# Altium PCB Transfomer_fully-interleaved-type1.PcbDoc (part 2 of 2)
Units mm, origin at the board's own origin, x right, y up, seen from the top; angles counter-clockwise.
Board outline 177 x 117 mm, 6 copper layers (Top Layer, Mid-Layer 1, Mid-Layer 2, Mid-Layer 3, Mid-Layer 4, Bottom Layer); 9 components, 18 nets, 66 pads, 510 vias.
Unrouted connection lines stored in the file: 9.
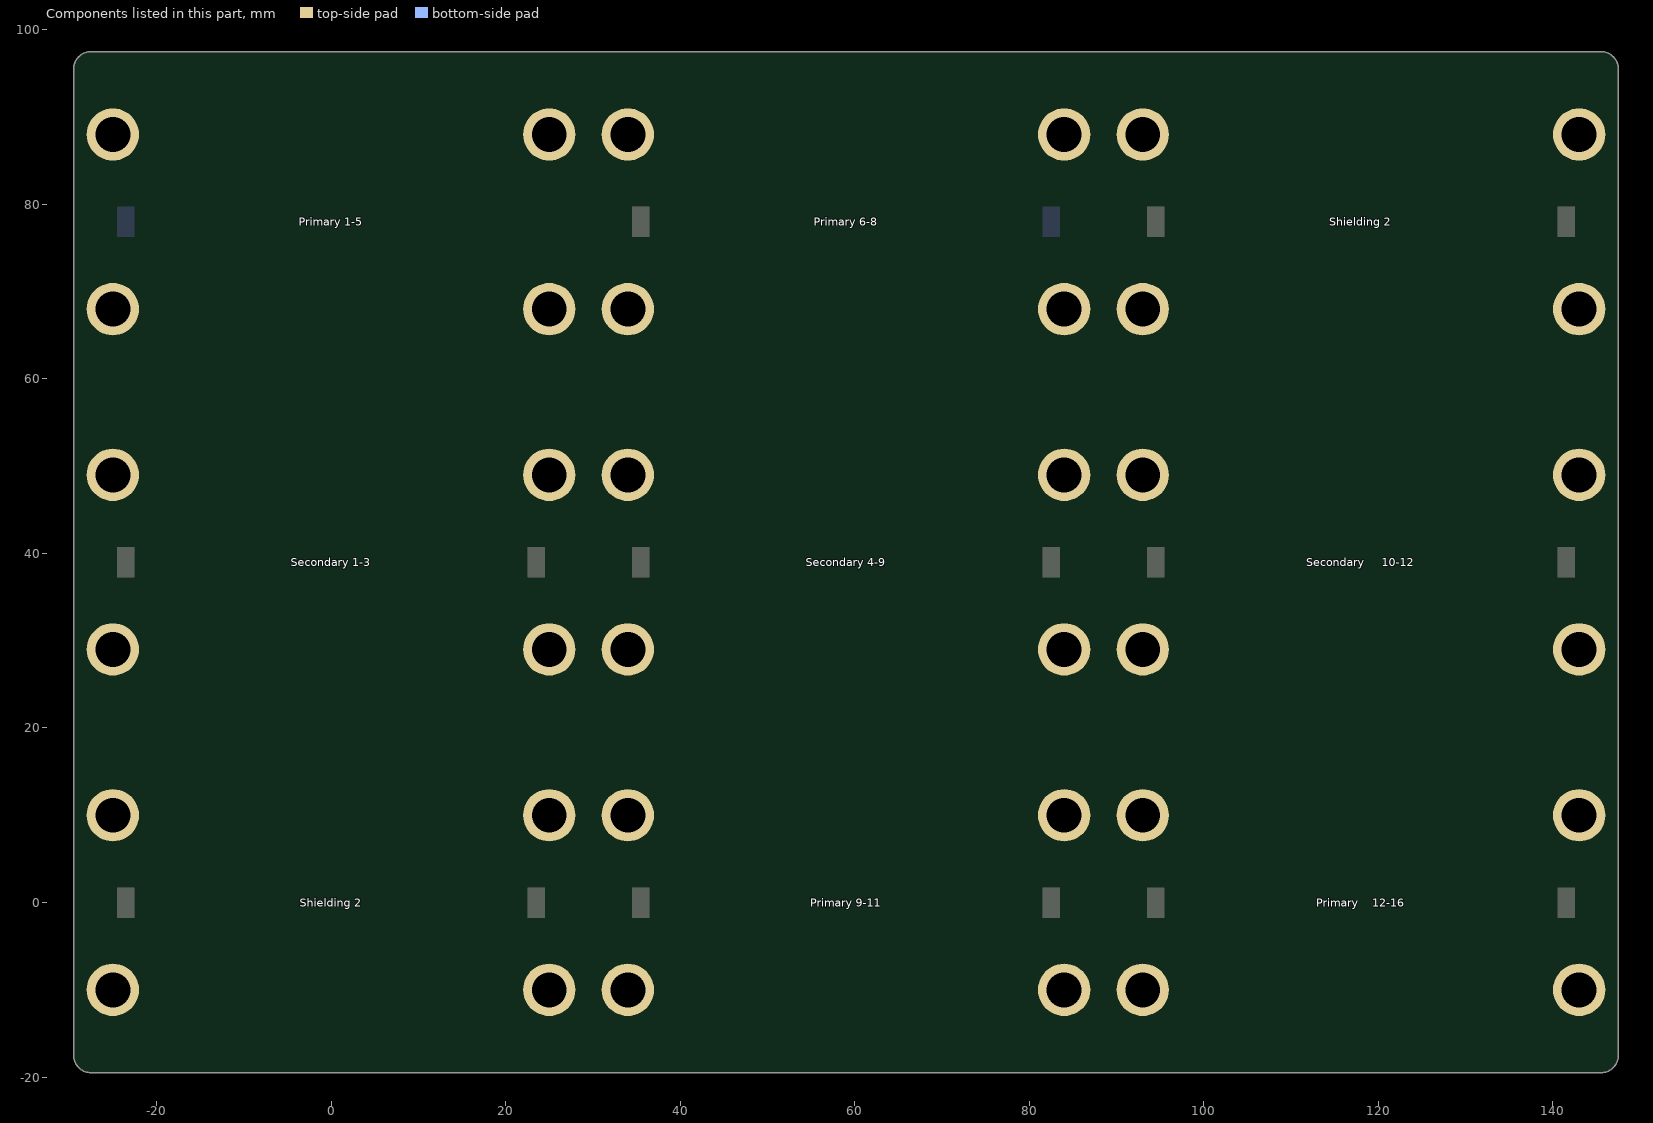
[diagram p6: the components of this part, seen from the top]

## Keep-outs (continued)
Mid-Layer 3:
  circle w1: c84,-10 r3.5
  circle w1: c84,10 r3.5
  circle w1: c34,-10 r3.5
  circle w1: c34,10 r3.5
  circle w1: c143,29 r3.5
  circle w1: c143,49 r3.5
  circle w1: c93,29 r3.5
  circle w1: c93,49 r3.5
  circle w1: c25,29 r3.5
  circle w1: c25,49 r3.5
  circle w1: c-25,29 r3.5
  circle w1: c-25,49 r3.5
  circle w1: c84,68 r3.5
  circle w1: c84,88 r3.5
  circle w1: c34,68 r3.5
  circle w1: c34,88 r3.5
  circle w1: c93,10 r3.5
  circle w1: c93,-10 r3.5
  circle w1: c143,10 r3.5
  circle w1: c143,-10 r3.5
  circle w1: c-25,10 r3.5
  circle w1: c-25,-10 r3.5
  circle w1: c25,10 r3.5
  circle w1: c25,-10 r3.5
  circle w1: c34,49 r3.5
  circle w1: c34,29 r3.5
  circle w1: c84,49 r3.5
  circle w1: c84,29 r3.5
  circle w1: c143,68 r3.5
  circle w1: c143,88 r3.5
  circle w1: c93,68 r3.5
  circle w1: c93,88 r3.5
  circle w1: c-25,88 r3.5
  circle w1: c-25,68 r3.5
  circle w1: c25,88 r3.5
  circle w1: c25,68 r3.5
  lines w1: -29,-6.5 -25,-6.5 ; -29,6.5 -25,6.5 ; -29,32.5 -25,32.5 ; -29,45.5 -25,45.5 ; -29,71.5 -25,71.5 ; -29,78 -10,78 ; -29,84.5 -25,84.5 ; -21.5,-14 -21.5,-10 ; -21.5,10 -21.5,14 ; -21.5,25 -21.5,29 ; -21.5,49 -21.5,53 ; -21.5,64 -21.5,68 ; -21.5,88 -21.5,92 ; 11,58.947 ccw(c0,78) 11,97.053 ; 21.5,-14 21.5,-10 ; 21.5,10 21.5,14 ; 21.5,25 21.5,29 ; 21.5,49 21.5,53 ; 21.5,64 21.5,68 ; 21.5,88 21.5,92 ; 25,-6.5 29,-6.5 ; 25,6.5 29,6.5 ; 25,32.5 29,32.5 ; 25,45.5 29,45.5 ; 25,71.5 29,71.5 ; 25,84.5 29,84.5 ; 30,-6.5 34,-6.5 ; 30,6.5 34,6.5 ; 30,32.5 34,32.5 ; 30,45.5 34,45.5 ; 30,71.5 34,71.5 ; 30,84.5 34,84.5 ; 37.5,-14 37.5,-10 ; 37.5,10 37.5,14 ; 37.5,25 37.5,29 ; 37.5,49 37.5,53 ; 37.5,64 37.5,68 ; 37.5,88 37.5,92 ; 80.5,-14 80.5,-10 ; 80.5,10 80.5,14 ; 80.5,25 80.5,29 ; 80.5,49 80.5,53 ; 80.5,64 80.5,68 ; 80.5,88 80.5,92 ; 84,-6.5 88,-6.5 ; 84,6.5 88,6.5 ; 84,32.5 88,32.5 ; 84,45.5 88,45.5 ; 84,71.5 88,71.5 ; 84,84.5 88,84.5 ; 89,-6.5 93,-6.5 ; 89,6.5 93,6.5 ; 89,32.5 93,32.5 ; 89,45.5 93,45.5 ; 89,71.5 93,71.5 ; 89,84.5 93,84.5 ; 96.5,-14 96.5,-10 ; 96.5,10 96.5,14 ; 96.5,25 96.5,29 ; 96.5,49 96.5,53 ; 96.5,64 96.5,68 ; 96.5,88 96.5,92 ; 139.5,-14 139.5,-10 ; 139.5,10 139.5,14 ; 139.5,25 139.5,29 ; 139.5,49 139.5,53 ; 139.5,64 139.5,68 ; 139.5,88 139.5,92 ; 143,-6.5 147,-6.5 ; 143,6.5 147,6.5 ; 143,32.5 147,32.5 ; 143,45.5 147,45.5 ; 143,71.5 147,71.5 ; 143,84.5 147,84.5
  lines w3: -9.959,72.25 cw(c0,78) -9.959,83.75
Mid-Layer 4:
  circle w1: c34,-10 r3.5
  circle w1: c34,10 r3.5
  circle w1: c84,-10 r3.5
  circle w1: c84,10 r3.5
  circle w1: c93,29 r3.5
  circle w1: c93,49 r3.5
  circle w1: c143,29 r3.5
  circle w1: c143,49 r3.5
  circle w1: c143,10 r3.5
  circle w1: c143,-10 r3.5
  circle w1: c93,10 r3.5
  circle w1: c25,10 r3.5
  circle w1: c25,-10 r3.5
  circle w1: c-25,10 r3.5
  circle w1: c-25,-10 r3.5
  circle w1: c84,49 r3.5
  circle w1: c84,29 r3.5
  circle w1: c34,49 r3.5
  circle w1: c34,29 r3.5
  circle w1: c25,49 r3.5
  circle w1: c25,29 r3.5
  circle w1: c-25,49 r3.5
  circle w1: c-25,29 r3.5
  circle w1: c93,68 r3.5
  circle w1: c93,88 r3.5
  circle w1: c143,68 r3.5
  circle w1: c143,88 r3.5
  circle w1: c34,68 r3.5
  circle w1: c34,88 r3.5
  circle w1: c84,68 r3.5
  circle w1: c84,88 r3.5
  circle w1: c-25,88 r3.5
  circle w1: c-25,68 r3.5
  circle w1: c25,88 r3.5
  circle w1: c25,68 r3.5
  lines w1: -29,-6.5 -25,-6.5 ; -29,6.5 -25,6.5 cw(c-25,-0.5) -18,-0.5 -18,-3.25 ccw(c-14,-3.25) -14,-7.25 -5.25,-7.25 ; -29,32.5 -25,32.5 ; -29,45.5 -25,45.5 ; -29,71.5 -25,71.5 ; -29,78 -26,78 -26,84.5 ; -29,84.5 -25,84.5 ; -21.5,-14 -21.5,-10 ; -21.5,10 -21.5,14 ; -21.5,25 -21.5,29 ; -21.5,49 -21.5,53 ; -21.5,64 -21.5,68 ; -21.5,68.25 -21.5,72.25 cw(c-18,72.25) -18,75.75 -9.25,75.75 ; -21.5,88 -21.5,92 ; -11,19.947 cw(c0,39) -11,58.053 ; 5.25,46.25 14,46.25 cw(c14,42.25) 18,42.25 18,39.5 ccw(c25,39.5) 25,32.5 29,32.5 ; 11,-19.053 ccw(c0,0) 11,19.053 ; 11,58.947 ccw(c0,78) 11,97.053 ; 21.5,-14 21.5,-10 ; 21.5,10 21.5,14 ; 21.5,25 21.5,29 ; 21.5,49 21.5,53 ; 21.5,64 21.5,68 ; 21.5,88 21.5,92 ; 25,-6.5 29,-6.5 ; 25,6.5 29,6.5 ; 25,45.5 29,45.5 ; 25,71.5 29,71.5 ; 25,84.5 29,84.5 ; 30,-6.5 34,-6.5 ; 30,6.5 34,6.5 ; 30,32.5 34,32.5 ; 30,45.5 34,45.5 cw(c34,38.5) 41,38.5 41,35.75 ccw(c45,35.75) 45,31.75 53.75,31.75 ; 30,71.5 34,71.5 ; 30,84.5 34,84.5 ; 37.5,-14 37.5,-10 ; 37.5,10 37.5,14 ; 37.5,25 37.5,29 ; 37.5,49 37.5,53 ; 37.5,64 37.5,68 ; 37.5,88 37.5,92 ; 48,-19.053 cw(c59,0) 48,19.053 ; 48,58.947 cw(c59,78) 48,97.053 ; 64.25,7.25 73,7.25 cw(c73,3.25) 77,3.25 77,0.5 ccw(c84,0.5) 84,-6.5 88,-6.5 ; 64.25,85.25 73,85.25 cw(c73,81.25) 77,81.25 77,78.5 ccw(c84,78.5) 84,71.5 88,71.5 ; 70,19.947 ccw(c59,39) 70,58.053 ; 80.5,-14 80.5,-10 ; 80.5,10 80.5,14 ; 80.5,25 80.5,29 ; 80.5,49 80.5,53 ; 80.5,64 80.5,68 ; 80.5,88 80.5,92 ; 84,6.5 88,6.5 ; 84,32.5 88,32.5 ; 84,45.5 88,45.5 ; 84,84.5 88,84.5 ; 89,-6.5 93,-6.5 cw(c93,-10) 95.475,-7.525 ; 89,6.5 93,6.5 ; 89,32.5 93,32.5 ; 89,45.5 93,45.5 ; 89,71.5 93,71.5 ; 89,84.5 93,84.5 cw(c93,77.5) 100,77.5 100,74.75 ccw(c104,74.75) 104,70.75 112.75,70.75 ; 95.5,-7.5 113,-7.5 ; 96.5,10 96.5,14 ; 96.5,25 96.5,29 ; 96.5,49 96.5,53 ; 96.5,64 96.5,68 ; 96.5,88 96.5,92 ; 107,19.947 cw(c118,39) 107,58.053 ; 123.25,46.25 132,46.25 cw(c132,42.25) 136,42.25 136,39.5 ccw(c143,39.5) 143,32.5 147,32.5 ; 129,-19.053 ccw(c118,0) 129,19.053 ; 129,58.947 ccw(c118,78) 129,97.053 ; 139.5,-14 139.5,-10 ; 139.5,10 139.5,14 ; 139.5,25 139.5,29 ; 139.5,49 139.5,53 ; 139.5,64 139.5,68 ; 139.5,88 139.5,92 ; 143,-6.5 147,-6.5 ; 143,6.5 147,6.5 ; 143,45.5 147,45.5 ; 143,71.5 147,71.5 ; 143,84.5 147,84.5
  lines w3: -27.5,79 -27.5,83.5 ; -11.456,76.998 cw(c0,78) -9.959,83.75 ; 90.5,-5.5 90.5,5.5
  lines w4: -9.959,33.25 cw(c0,39) -9.959,44.75 ; 9.959,-5.75 ccw(c0,0) 9.959,5.75 ; 49.041,-5.75 cw(c59,0) 49.041,5.75 ; 49.041,72.25 cw(c59,78) 49.041,83.75 ; 68.959,33.25 ccw(c59,39) 68.959,44.75 ; 108.041,33.25 cw(c118,39) 108.041,44.75 ; 127.959,-5.75 ccw(c118,0) 127.959,5.75 ; 127.959,72.25 ccw(c118,78) 127.959,83.75
Bottom Layer:
  circle w1: c34,-10 r3.5
  circle w1: c34,10 r3.5
  circle w1: c84,-10 r3.5
  circle w1: c84,10 r3.5
  circle w1: c93,29 r3.5
  circle w1: c93,49 r3.5
  circle w1: c143,29 r3.5
  circle w1: c143,49 r3.5
  circle w1: c143,-10 r3.5
  circle w1: c143,10 r3.5
  circle w1: c93,-10 r3.5
  circle w1: c93,10 r3.5
  circle w1: c25,-10 r3.5
  circle w1: c25,10 r3.5
  circle w1: c-25,-10 r3.5
  circle w1: c-25,10 r3.5
  circle w1: c84,29 r3.5
  circle w1: c84,49 r3.5
  circle w1: c34,29 r3.5
  circle w1: c34,49 r3.5
  circle w1: c25,49 r3.5
  circle w1: c25,29 r3.5
  circle w1: c-25,49 r3.5
  circle w1: c-25,29 r3.5
  circle w1: c93,88 r3.5
  circle w1: c93,68 r3.5
  circle w1: c143,88 r3.5
  circle w1: c143,68 r3.5
  circle w1: c34,68 r3.5
  circle w1: c34,88 r3.5
  circle w1: c84,68 r3.5
  circle w1: c84,88 r3.5
  circle w1: c25,88 r3.5
  circle w1: c25,68 r3.5
  circle w1: c-25,88 r3.5
  circle w1: c-25,68 r3.5
  lines w1: -29,-6.5 -25,-6.5 ; -29,6.5 -25,6.5 ; -29,32.5 -25,32.5 ; -29,45.5 -25,45.5 ; -29,71.5 -25,71.5 ; -29,84.5 -25,84.5 ; -26,32.5 -26,45.5 ; -26,71.5 -26,84.5 ; -21.5,-14 -21.5,-10 ; -21.5,10 -21.5,14 ; -21.5,25 -21.5,29 ; -21.5,49 -21.5,53 ; -21.5,64 -21.5,68 ; -21.5,88 -21.5,92 ; 21.5,-14 21.5,-10 ; 21.5,10 21.5,14 ; 21.5,25 21.5,29 ; 21.5,49 21.5,53 ; 21.5,64 21.5,68 ; 21.5,88 21.5,92 ; 25,-6.5 29,-6.5 ; 25,6.5 29,6.5 ; 25,32.5 29,32.5 ; 25,45.5 29,45.5 ; 25,71.5 29,71.5 ; 25,84.5 29,84.5 ; 26,-6.5 26,6.5 ; 30,-6.5 34,-6.5 ; 30,6.5 34,6.5 ; 30,32.5 34,32.5 ; 30,45.5 34,45.5 ; 30,71.5 34,71.5 ; 30,84.5 34,84.5 ; 33,-6.5 33,6.5 ; 33,71.5 33,84.5 ; 37.5,-14 37.5,-10 ; 37.5,10 37.5,14 ; 37.5,25 37.5,29 ; 37.5,49 37.5,53 ; 37.5,64 37.5,68 ; 37.5,88 37.5,92 ; 80.5,-14 80.5,-10 ; 80.5,10 80.5,14 ; 80.5,25 80.5,29 ; 80.5,49 80.5,53 ; 80.5,64 80.5,68 ; 80.5,88 80.5,92 ; 84,-6.5 88,-6.5 ; 84,6.5 88,6.5 ; 84,32.5 88,32.5 ; 84,45.5 88,45.5 ; 84,71.5 88,71.5 ; 84,84.5 88,84.5 ; 85,32.5 85,45.5 ; 89,-6.5 93,-6.5 ; 89,6.5 93,6.5 ; 89,32.5 93,32.5 ; 89,45.5 93,45.5 ; 89,71.5 93,71.5 ; 89,84.5 93,84.5 ; 92,32.5 92,45.5 ; 96.5,-14 96.5,-10 ; 96.5,10 96.5,14 ; 96.5,25 96.5,29 ; 96.5,49 96.5,53 ; 96.5,64 96.5,68 ; 96.5,88 96.5,92 ; 139.5,-14 139.5,-10 ; 139.5,10 139.5,14 ; 139.5,25 139.5,29 ; 139.5,49 139.5,53 ; 139.5,64 139.5,68 ; 139.5,88 139.5,92 ; 143,-6.5 147,-6.5 ; 143,6.5 147,6.5 ; 143,32.5 147,32.5 ; 143,45.5 147,45.5 ; 143,71.5 147,71.5 ; 143,84.5 147,84.5 ; 144,71.5 144,84.5
  lines w3: -27.5,33.5 -27.5,44.5 ; -27.5,72.5 -27.5,83.5 ; -11.456,76.998 cw(c0,78) -9.959,83.75 ; 27.5,-5.5 27.5,5.5 ; 31.5,-5.5 31.5,5.5 ; 31.5,72.5 31.5,83.5 ; 86.5,33.5 86.5,44.5 ; 90.5,33.5 90.5,44.5 ; 145.5,72.5 145.5,83.5
Keep-Out Layer:
  lines w0.254: -19.5,19.5 -27.5,19.5 ; -19.5,58.5 -27.5,58.5 ; 19.5,19.5 27.5,19.5 ; 19.5,58.5 27.5,58.5 ; 39.5,19.5 31.5,19.5 ; 39.5,58.5 31.5,58.5 ; 78.5,19.5 86.5,19.5 ; 78.5,58.5 86.5,58.5 ; 98.5,19.5 90.5,19.5 ; 98.5,58.5 90.5,58.5 ; 137.5,19.5 145.5,19.5 ; 137.5,58.5 145.5,58.5 ; -29.5,-17.5 ccw(c-27.5,-17.5) -27.5,-19.5 ; -29.5,-17.5 ccw(c-27.5,-17.5) -27.5,-19.5 ; -29.5,-17.5 -29.5,95.5 ; -29.5,-17.5 -29.5,17.5 cw(c-27.5,17.5) -27.5,19.5 ; -29.5,95.5 cw(c-27.5,95.5) -27.5,97.5 ; -29.5,95.5 cw(c-27.5,95.5) -27.5,97.5 ; -29.5,95.5 cw(c-27.5,95.5) -27.5,97.5 ; -29.5,95.5 -29.5,60.5 ccw(c-27.5,60.5) -27.5,58.5 ; -27.5,-19.5 27.5,-19.5 ccw(c27.5,-17.5) 29.5,-17.5 ; -27.5,-19.5 145.5,-19.5 ; -27.5,19.5 cw(c-27.5,21.5) -29.5,21.5 -29.5,56.5 cw(c-27.5,56.5) -27.5,58.5 ; -27.5,97.5 145.5,97.5 ; -27.5,97.5 27.5,97.5 cw(c27.5,95.5) 29.5,95.5 ; 27.5,19.5 ccw(c27.5,21.5) 29.5,21.5 ; 27.5,19.5 cw(c27.5,17.5) 29.5,17.5 ; 27.5,58.5 cw(c27.5,56.5) 29.5,56.5 ; 27.5,58.5 ccw(c27.5,60.5) 29.5,60.5 ; 29.5,-17.5 ccw(c31.5,-17.5) 31.5,-19.5 86.5,-19.5 ccw(c86.5,-17.5) 88.5,-17.5 ; 29.5,-17.5 29.5,17.5 ; 29.5,17.5 cw(c31.5,17.5) 31.5,19.5 ; 29.5,21.5 ccw(c31.5,21.5) 31.5,19.5 ; 29.5,21.5 29.5,56.5 ; 29.5,56.5 cw(c31.5,56.5) 31.5,58.5 ; 29.5,60.5 ccw(c31.5,60.5) 31.5,58.5 ; 29.5,60.5 29.5,95.5 ; 29.5,95.5 cw(c31.5,95.5) 31.5,97.5 86.5,97.5 cw(c86.5,95.5) 88.5,95.5 ; 86.5,19.5 ccw(c86.5,21.5) 88.5,21.5 ; 86.5,19.5 cw(c86.5,17.5) 88.5,17.5 ; 86.5,58.5 cw(c86.5,56.5) 88.5,56.5 ; 86.5,58.5 ccw(c86.5,60.5) 88.5,60.5 ; 88.5,-17.5 ccw(c90.5,-17.5) 90.5,-19.5 145.5,-19.5 ; 88.5,-17.5 88.5,17.5 ; 88.5,17.5 cw(c90.5,17.5) 90.5,19.5 ; 88.5,21.5 ccw(c90.5,21.5) 90.5,19.5 ; 88.5,21.5 88.5,56.5 ; 88.5,56.5 cw(c90.5,56.5) 90.5,58.5 ; 88.5,60.5 ccw(c90.5,60.5) 90.5,58.5 ; 88.5,60.5 88.5,95.5 ; 88.5,95.5 cw(c90.5,95.5) 90.5,97.5 145.5,97.5 ; 145.5,-19.5 ccw(c145.5,-17.5) 147.5,-17.5 ; 145.5,-19.5 ccw(c145.5,-17.5) 147.5,-17.5 ; 145.5,19.5 ccw(c145.5,21.5) 147.5,21.5 147.5,56.5 ccw(c145.5,56.5) 145.5,58.5 ; 145.5,19.5 cw(c145.5,17.5) 147.5,17.5 147.5,-17.5 ; 145.5,58.5 ccw(c145.5,60.5) 147.5,60.5 147.5,95.5 ; 145.5,97.5 cw(c145.5,95.5) 147.5,95.5 ; 145.5,97.5 cw(c145.5,95.5) 147.5,95.5 ; 145.5,97.5 cw(c145.5,95.5) 147.5,95.5 ; 147.5,-17.5 147.5,95.5

## Silkscreen, mask and mechanical layers (free items; w line width, h text height)
Top Overlay:
  text "Primary 1-4" at -7.871,89.762 h1.52
  text "Primary 5" at 52.525,89.762 h1.52
  text "Primary 6-7" at 110.002,89.762 h1.52
  text "Secondary 1-2" at 68.522,66.238 h1.52 r180
  text "Secondary 3" at 126.125,66.238 h1.52 r180
  text "fully interleaved type-I" at -13.5,65.5 h1.52 r90
  text "fully interleaved type-I" at 45.5,65.5 h1.52 r90
  text "fully interleaved type-I" at 104.5,65.5 h1.52 r90
  text "Primary 8" at -6.475,50.762 h1.52
  text "Primary 9-10" at 50.367,50.762 h1.52
  text "Primary 11" at 111.144,50.762 h1.52
  text "Secondary 4-5" at 9.649,27.238 h1.52 r180
  text "Secondary 6" at 67.125,27.238 h1.52 r180
  text "Secondary 7-8" at 127.649,27.238 h1.52 r180
  text "fully interleaved type-I" at -13.5,26.5 h1.52 r90
  text "fully interleaved type-I" at 45.5,26.5 h1.52 r90
  text "fully interleaved type-I" at 104.5,26.5 h1.52 r90
  text "Primary 12-13" at -9.268,11.762 h1.52
  text "Primary 14" at 51.89,11.762 h1.52
  text "Primary 15-16" at 108.732,11.762 h1.52
  text "Secondary 9" at 8.125,-11.762 h1.52 r180
  text "Secondary 10-11" at 69.665,-11.762 h1.52 r180
  text "Secondary 12" at 126.76,-11.762 h1.52 r180
  text "fully interleaved type-I" at -13.5,-12.5 h1.52 r90
  text "fully interleaved type-I" at 45.5,-12.5 h1.52 r90
  text "fully interleaved type-I" at 104.5,-12.5 h1.52 r90